# Altium PCB LNA.PcbDoc (part 2 of 2)
Units mm, origin at the board's own origin, x right, y up, seen from the top; angles counter-clockwise.
Board outline 50 x 50 mm, 4 copper layers (Top Layer, Layer 2, Layer 3, Bottom Layer), stack 1.513 mm thick; 84 components, 40 nets, 185 pads, 185 vias.
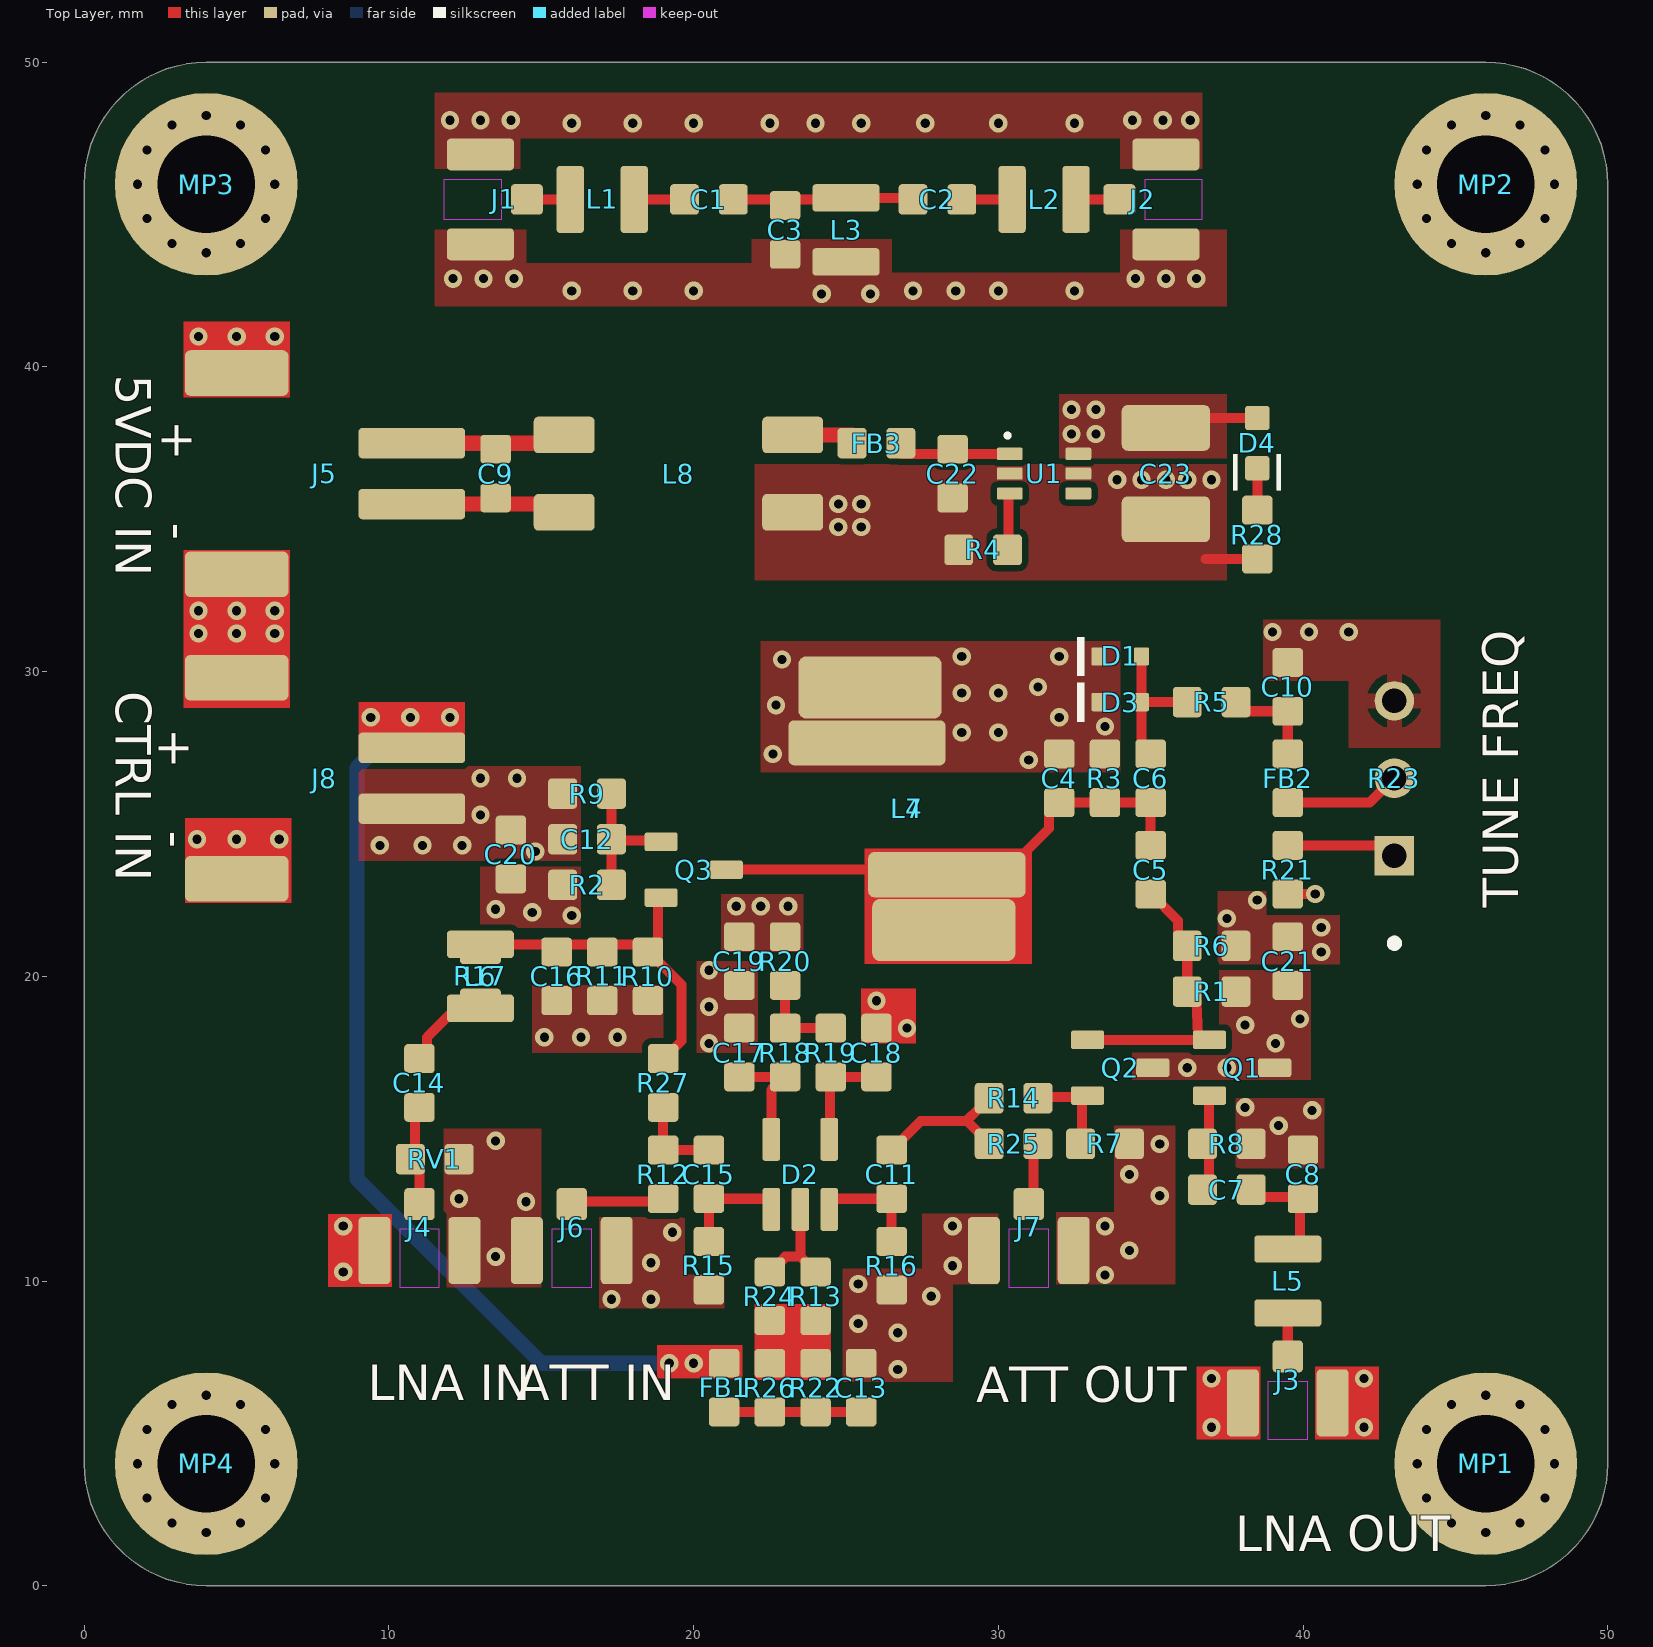
[diagram p0: Top Layer view]

## Polygon pours and split planes (outlines as drawn) (continued)
GND on Top Layer "NONET_L-01_P-001" (solid, remove dead copper, pour order 5): 14.5,44.5 14.5,43.4 21.9,43.4 21.9,44.2 26.5,44.2 26.5,43.1 34,43.1 34,44.5 37.5,44.5 37.5,42 11.5,42 11.5,44.5
+5V on Top Layer "+5V_L01_P004" (solid, remove dead copper, pour order 4): 32,37 37.5,37 37.5,39.1 32,39.1
GND on Top Layer "GND_L01_P003" (solid, remove dead copper, pour order 3): 22,36.8 37.5,36.8 37.5,33 22,33

## Other copper
Top Layer:
  rectangle net GND: 3.3,22.4 6.8,25.2
  rectangle net Q_TUNE: 9,27.1 12.5,29
  rectangle net Q_TUNE: 18.8,6.8 21.6,7.9
  rectangle net NetR13_2: 22,6.75 24.5,9.25
  rectangle net GND: 8,9.8 10.1,12.2
  region net GND: 42.5,7.2 40.4,7.2 40.4,4.8 42.5,4.8
  rectangle net GND: 36.5,4.8 38.6,7.2
  rectangle net NetC4_1: 25.6,20.4 31.1,24.2
  rectangle net GND: 25.5,17.8 27.3,19.6
  region net GND: 6.75,34 3.25,34 3.25,28.8 6.75,28.8
  rectangle net GND: 3.25,39 6.75,41.5
Bottom Layer:
  rectangle net Q_TUNE: 9,27 12.5,29
  rectangle net Q_TUNE: 18.8,6.8 20.5,7.9

## Silkscreen, mask and mechanical layers (free items; w line width, h text height)
Top Overlay:
  text "5VDC IN" at 0.635,39.75 h2 r270
  text "+    -" at 2.155,38.25 h2 r270
  text "CTRL IN" at 0.635,29.35 h2 r270
  text "+    -" at 2.055,28.15 h2 r270
  text "TUNE FREQ" at 47.465,22.25 h2 r90
  text "LNA IN" at 9.3,5.694 h2
  text "ATT IN" at 14.2,5.694 h2
  text "ATT OUT" at 29.275,5.634 h2
  text "LNA OUT" at 37.775,0.734 h2
Bottom Overlay:
  region: 32,47.5 32,39.5 40,39.5 40,47.5
  text "JLCJLCJLCJLC" at 30.55,39.55 h1
  text ".board_name / .board_revision.-" at 35.103,1.635 h2.5
  text ".VersionControl_RevNumberShort" at 27.553,-2.025 h2.5
Board:
  the board outline again, w0.1
Fab Notes:
  drawing of 196 lines, arcs and shapes, not listed
  text "Layer" at 61.917,87.03 h2
  text "Name" at 70.338,87.03 h2
  text "Material" at 87,87.03 h2
  text "Thickness" at 98.216,87.03 h2
  text "Constant" at 109.509,87.03 h2
  text "Board Layer Stack" at 120.862,87.03 h2
  text "Top Overlay" at 70.338,83.03 h2
  text "Top Solder" at 70.338,79.03 h2
  text "SM-001" at 87,79.03 h2
  text "0.025mm" at 98.216,79.03 h2
  text "4" at 109.509,79.03 h2
  text "1" at 61.917,75.03 h2
  text "Top Layer" at 70.338,75.03 h2
  text "CF-004" at 87,75.03 h2
  text "0.035mm" at 98.216,75.03 h2
  text "Dielectric 2" at 70.338,71.03 h2
  text "PP-022" at 87,71.03 h2
  text "0.208mm" at 98.216,71.03 h2
  text "4.5" at 109.509,71.03 h2
  text "2" at 61.917,67.03 h2
  text "Layer 2" at 70.338,67.03 h2
  text "CF-003" at 87,67.03 h2
  text "0.018mm" at 98.216,67.03 h2
  text "Dielectric 3" at 70.338,63.03 h2
  text "Core-042" at 87,63.03 h2
  text "0.991mm" at 98.216,63.03 h2
  text "4.6" at 109.509,63.03 h2
  text "3" at 61.917,59.03 h2
  text "Layer 3" at 70.338,59.03 h2
  text "CF-003" at 87,59.03 h2
  text "0.018mm" at 98.216,59.03 h2
  text "Dielectric 5" at 70.338,55.03 h2
  text "PP-022" at 87,55.03 h2
  text "0.208mm" at 98.216,55.03 h2
  text "4.5" at 109.509,55.03 h2
  text "4" at 61.917,51.03 h2
  text "Bottom Layer" at 70.338,51.03 h2
  text "CF-004" at 87,51.03 h2
  text "0.035mm" at 98.216,51.03 h2
  text "Bottom Solder" at 70.338,47.03 h2
  text "SM-001" at 87,47.03 h2
  text "0.025mm" at 98.216,47.03 h2
  text "4" at 109.509,47.03 h2
  text "Bottom Overlay" at 70.338,43.03 h2
  text "1. Layer count : .Layer_Count / 2. Dimensions : .Board_Width x .Board_Height / 3. PCB Thickness : .Total_Thickness / 4. PCB Color : green / 5. Silkscreen : white / 6. Material type : >=FR4-TG155 / 7. Surface finish : Pb-free HASL / 8. Gold thickness : 1U\" / 9. Outer copper weight : 1oz / 10. Inner copper weight : 0.5oz / 11. Impedance control : No / 12. Layer stackup : JLC04161H-7628 / 13. Via covering : Tented / 14. Minimum hole size : .Hole_Size_Min / 15. Board outline tolerance : +/- 0.2mm / 16. Mark on PCB : 2D bardcode & Number | Data Matrix Code | .board_name _ABCDE_0001 | 8x8mm / 17. Gold fingers : No / 18. Castellated holes : No / 19. Press-fit holes : No / 20. Edge plating : No / 21. Hole count : .Hole_Count / 22. SMD solder joints : .PadSMD_Count / 23. Through-hole solder joints : .PadThru_Count" at 60,0.531 h2